# EAGLE board TicTacToe (EAGLE 7.6.0)

Size 73.58 x 63.39 mm. Coordinates in mm from the lower left corner, seen from the top.
Outline: 0,0 56.82,0 56.82,53.33 0,53.33 0,0
Copper layers (1*16): Top 0.035mm / dielectric 1.5mm / Bottom 0.035mm
Design rules "default": minimum track width 10mil, minimum drill 24mil, track to track 8mil, track to pad 8mil, pad to pad 8mil, via to via 8mil, smd to smd 8mil, copper to edge 40mil, drill to drill 8mil, minimum pad ring 10mil, minimum via ring 8mil, stop-mask expansion 4mil, vias tented up to drill 0mil, thermal gap 10mil

## Footprints (pad centres in the part's own frame; a part is rotated, then mirrored left to right if it is on the bottom)
LED5MM = drill 0.813 octagon: A -1.27,0; K 1.27,0
0207/10 = drill 0.813 octagon: 1 -5.08,0; 2 5.08,0
DIL16 = drill 0.813 long: 1 -8.89,-3.81; 2 -6.35,-3.81; 3 -3.81,-3.81; 4 -1.27,-3.81; 5 1.27,-3.81; 6 3.81,-3.81; 7 6.35,-3.81; 8 8.89,-3.81; 9 8.89,3.81; 10 6.35,3.81; 11 3.81,3.81; 12 1.27,3.81; 13 -1.27,3.81; 14 -3.81,3.81; 15 -6.35,3.81; 16 -8.89,3.81
ARDUINO_UNO = drill 1.016 pad 1.88: 0 63.5,50.8; 1 60.96,50.8; 2 58.42,50.8; 3 55.88,50.8; 3.3V 35.56,2.54; 4 53.34,50.8; 5 50.8,50.8; 5V 38.1,2.54; 6 48.26,50.8; 7 45.72,50.8; 8 41.656,50.8; 9 39.116,50.8; 10 36.576,50.8; 11 34.036,50.8; 12 31.496,50.8; 13 28.956,50.8; A0 50.8,2.54; A1 53.34,2.54; A2 55.88,2.54; A3 58.42,2.54; A4 60.96,2.54; A5 63.5,2.54; AREF 23.876,50.8; GND 26.416,50.8; GND. 43.18,2.54; GND.. 40.64,2.54; I/OREF 30.48,2.54; N/C 27.94,2.54; RESET 33.02,2.54; SCL 18.796,50.8; SDA 21.336,50.8; VIN 45.72,2.54 | hole 3.2: 66.04,7.62; 66.04,35.56; 15.24,50.8; 13.97,2.54
1X3P-2.54-2.54-11.6-3.0-BLACK-MALE = drill 0.889 pad 1.651 square: 1 0,2.54 | drill 0.889 pad 1.651: 2 0,0; 3 0,-2.54

## Placement (x,y rotation side)
D2  [LED5MM]  5,327.58 0 top  (outside the outline)
D3  [LED5MM]  5,340.28 0 top  (outside the outline)
D4  [LED5MM]  5,352.98 0 top  (outside the outline)
D5  [LED5MM]  5,365.68 0 top  (outside the outline)
D6  [LED5MM]  5,378.38 0 top  (outside the outline)
D7  [LED5MM]  5,391.08 0 top  (outside the outline)
D8  [LED5MM]  5,403.78 0 top  (outside the outline)
D9  [LED5MM]  5,416.48 0 top  (outside the outline)
D10  [LED5MM]  5,429.18 0 top  (outside the outline)
D11  [LED5MM]  5,441.88 0 top  (outside the outline)
D12  [LED5MM]  5,454.58 0 top  (outside the outline)
D13  [LED5MM]  5,467.28 0 top  (outside the outline)
D14  [LED5MM]  5,479.98 0 top  (outside the outline)
D15  [LED5MM]  5,492.68 0 top  (outside the outline)
D16  [LED5MM]  5,505.38 0 top  (outside the outline)
D17  [LED5MM]  5,518.08 0 top  (outside the outline)
D18  [LED5MM]  5,530.78 0 top  (outside the outline)
D19  [LED5MM]  5,543.48 0 top  (outside the outline)
D20  [LED5MM]  5,556.18 0 top  (outside the outline)
D21  [LED5MM]  5,568.88 0 top  (outside the outline)
R2  220‎Ω  [0207/10]  5,73.58 0 top  (outside the outline)
R3  220‎Ω  [0207/10]  5,86.28 0 top  (outside the outline)
R4  220‎Ω  [0207/10]  5,98.98 0 top  (outside the outline)
R5  220‎Ω  [0207/10]  5,111.68 0 top  (outside the outline)
R6  220‎Ω  [0207/10]  5,124.38 0 top  (outside the outline)
R7  220‎Ω  [0207/10]  5,137.08 0 top  (outside the outline)
R8  220‎Ω  [0207/10]  5,149.78 0 top  (outside the outline)
R9  220‎Ω  [0207/10]  5,162.48 0 top  (outside the outline)
R10  220‎Ω  [0207/10]  5,175.18 0 top  (outside the outline)
R11  220‎Ω  [0207/10]  5,187.88 0 top  (outside the outline)
R12  220‎Ω  [0207/10]  5,200.58 0 top  (outside the outline)
R13  220‎Ω  [0207/10]  5,213.28 0 top  (outside the outline)
R14  220‎Ω  [0207/10]  5,225.98 0 top  (outside the outline)
R15  220‎Ω  [0207/10]  5,238.68 0 top  (outside the outline)
R16  220‎Ω  [0207/10]  5,251.38 0 top  (outside the outline)
R17  220‎Ω  [0207/10]  5,264.08 0 top  (outside the outline)
R18  220‎Ω  [0207/10]  5,276.78 0 top  (outside the outline)
R19  220‎Ω  [0207/10]  5,289.48 0 top  (outside the outline)
R20  220‎Ω  [0207/10]  5,302.18 0 top  (outside the outline)
R21  220‎Ω  [0207/10]  5,314.88 0 top  (outside the outline)
U1  [DIL16]  5,22.78 0 top
U2  [DIL16]  5,35.48 0 top
U3  [DIL16]  5,48.18 0 top
UArduino  [ARDUINO_UNO]  5,10.08 0 top
UIR Sensor  [1X3P-2.54-2.54-11.6-3.0-BLACK-MALE]  5,60.88 0 top

## Library data of the parts
D2-D21 R2-R21 U1-U3 UArduino UIR Sensor = AUTODESK_CIRCUITS_BREADBOARD

## Nets
N$1: D3.A U1.1
N$2: D6.A U1.4
N$3: D8.A U1.6
N$4: D9.A U1.7
N$5: D4.A U1.2
N$6: U1.12 U2.12 U3.12 UArduino.8
N$7: D7.A U1.5
N$8: U1.14 UArduino.11
N$9: D2.A U1.15
N$10: D5.A U1.3
N$11: U1.9 U2.14
N$12: U1.11 U2.11 U3.11 UArduino.12
N$13: D11.A U2.1
N$14: D14.A U2.4
N$15: D16.A U2.6
N$16: D17.A U2.7
N$17: D12.A U2.2
N$18: D15.A U2.5
N$19: D10.A U2.15
N$20: D13.A U2.3
N$21: U2.9 U3.14
N$22: D19.A U3.1
N$23: U3.4
N$24: U3.6
N$25: U3.7
N$26: D20.A U3.2
N$27: U3.5
N$28: D18.A U3.15
N$29: D21.A U3.3
N$30: U3.9
N$31: U1.10 U1.16 U2.10 U2.16 U3.10 U3.16 UArduino.5V UIR Sensor.1
N$32: R2.2 R3.2 R4.2 R5.2 R6.2 R7.2 R8.2 R9.2 R10.2 R11.2 R12.2 R13.2 R14.2 R15.2 R16.2 R17.2 R18.2 R19.2 R20.2 R21.2 U1.8 U1.13 U2.8 U2.13 U3.8 U3.13 UArduino.GND.. UIR Sensor.2
N$33: UArduino.2 UIR Sensor.3
N$34: D2.K R2.1
N$35: D3.K R3.1
N$36: D4.K R4.1
N$37: D5.K R5.1
N$38: D6.K R6.1
N$39: D8.K R8.1
N$40: D9.K R9.1
N$41: D10.K R10.1
N$42: D11.K R11.1
N$43: D12.K R12.1
N$44: D13.K R13.1
N$45: D14.K R14.1
N$46: D15.K R15.1
N$47: D16.K R16.1
N$48: D17.K R17.1
N$49: D18.K R18.1
N$50: D19.K R19.1
N$51: D20.K R20.1
N$52: D21.K R21.1
N$53: D7.K R7.1

## Tracks (layer width: path | path; a pad name or v marks a point on that pad's centre or on a via)
N$1  (1 unrouted)
N$2  (1 unrouted)
N$3  (1 unrouted)
N$4  (1 unrouted)
N$5  (1 unrouted)
N$6  (3 unrouted)
N$7  (1 unrouted)
N$8  (1 unrouted)
N$9  (1 unrouted)
N$10  (1 unrouted)
N$11  (1 unrouted)
N$12  (3 unrouted)
N$13  (1 unrouted)
N$14  (1 unrouted)
N$15  (1 unrouted)
N$16  (1 unrouted)
N$17  (1 unrouted)
N$18  (1 unrouted)
N$19  (1 unrouted)
N$20  (1 unrouted)
N$21  (1 unrouted)
N$22  (1 unrouted)
N$26  (1 unrouted)
N$28  (1 unrouted)
N$29  (1 unrouted)
N$31  (7 unrouted)
N$32  (27 unrouted)
N$33  (1 unrouted)
N$34  (1 unrouted)
N$35  (1 unrouted)
N$36  (1 unrouted)
N$37  (1 unrouted)
N$38  (1 unrouted)
N$39  (1 unrouted)
N$40  (1 unrouted)
N$41  (1 unrouted)
N$42  (1 unrouted)
N$43  (1 unrouted)
N$44  (1 unrouted)
N$45  (1 unrouted)
N$46  (1 unrouted)
N$47  (1 unrouted)
N$48  (1 unrouted)
N$49  (1 unrouted)
N$50  (1 unrouted)
N$51  (1 unrouted)
N$52  (1 unrouted)
N$53  (1 unrouted)